# Altium PCB 收音机.PcbDoc
Units mil, origin at the board's own origin, x right, y up, seen from the top; angles counter-clockwise.
Board outline 3937.01 x 3150 mil, 2 copper layers (Top Layer, Bottom Layer); 51 components, 32 nets, 137 pads, 52 vias.
Unrouted connection lines stored in the file: 8.
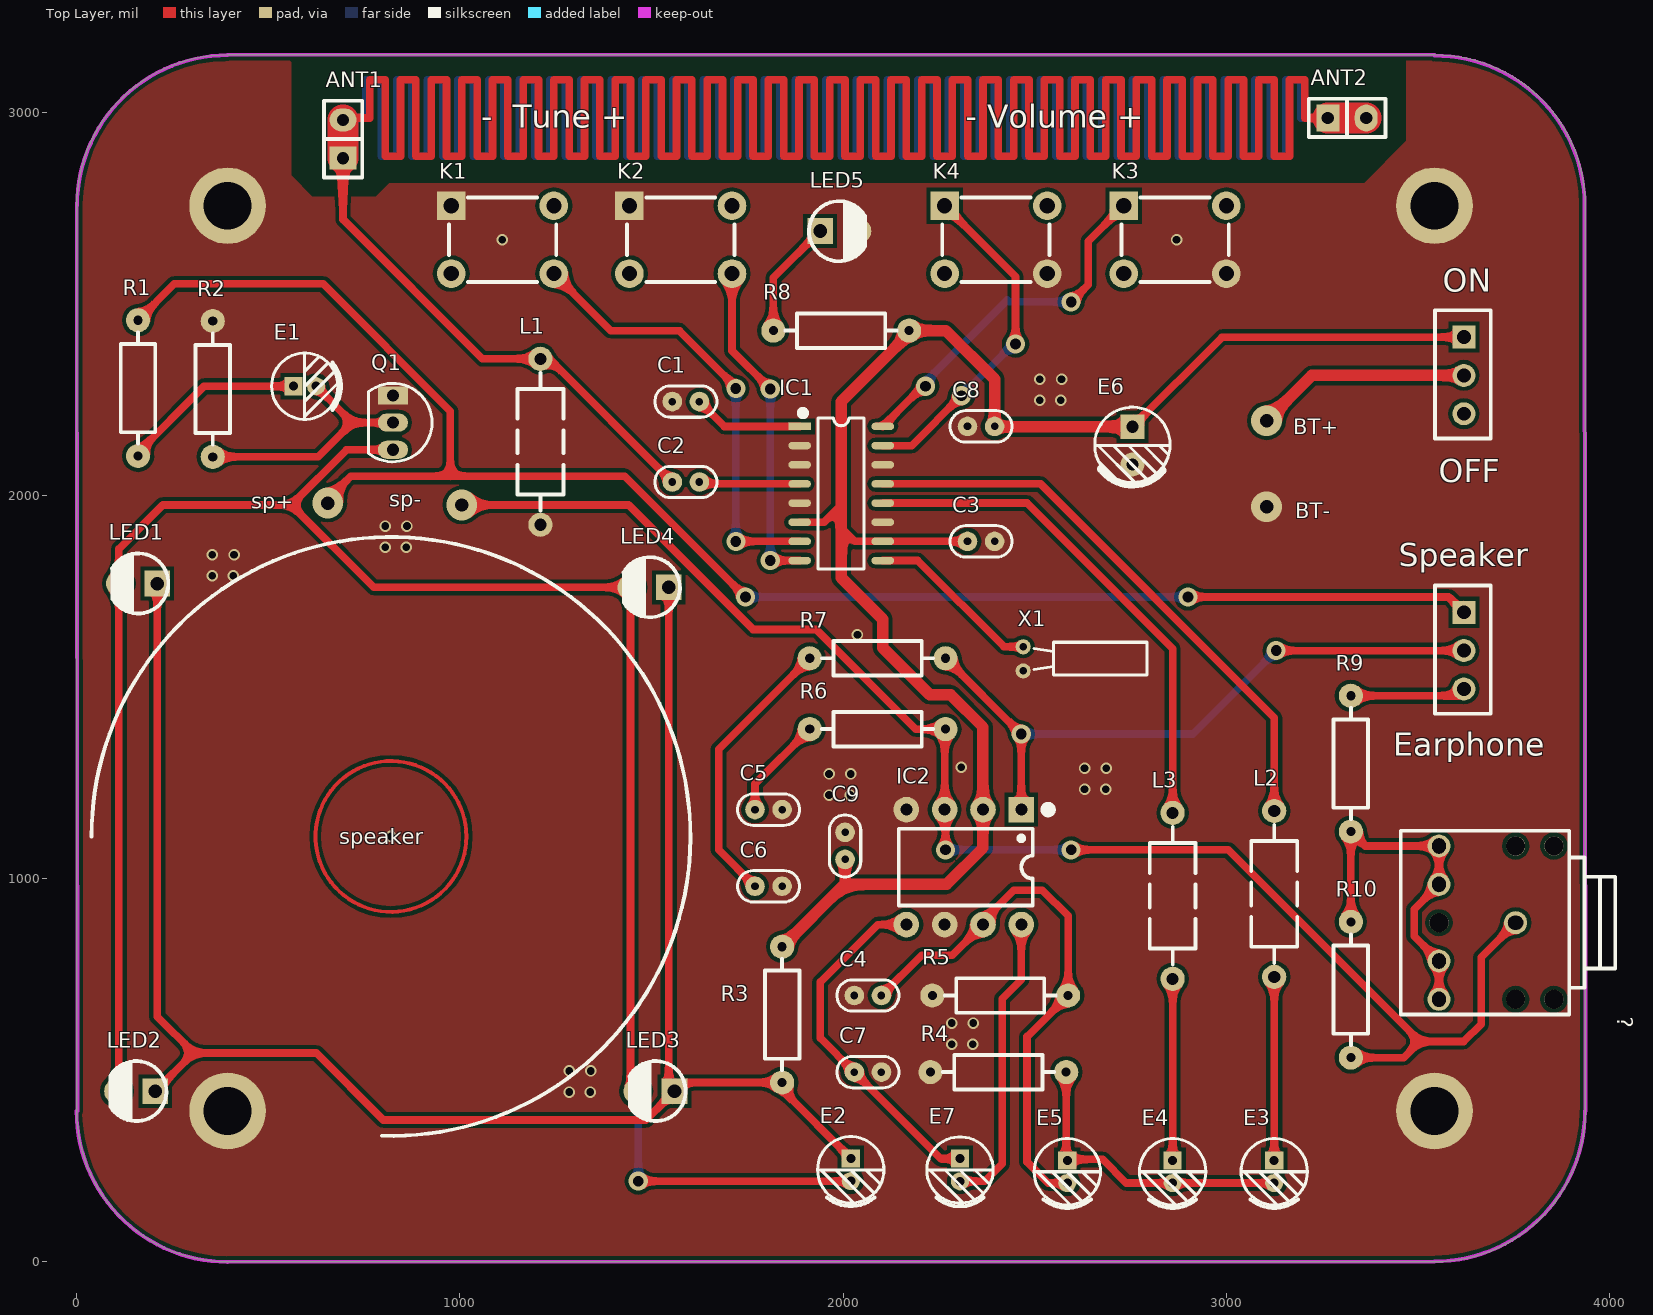
[diagram p0: Top Layer view]
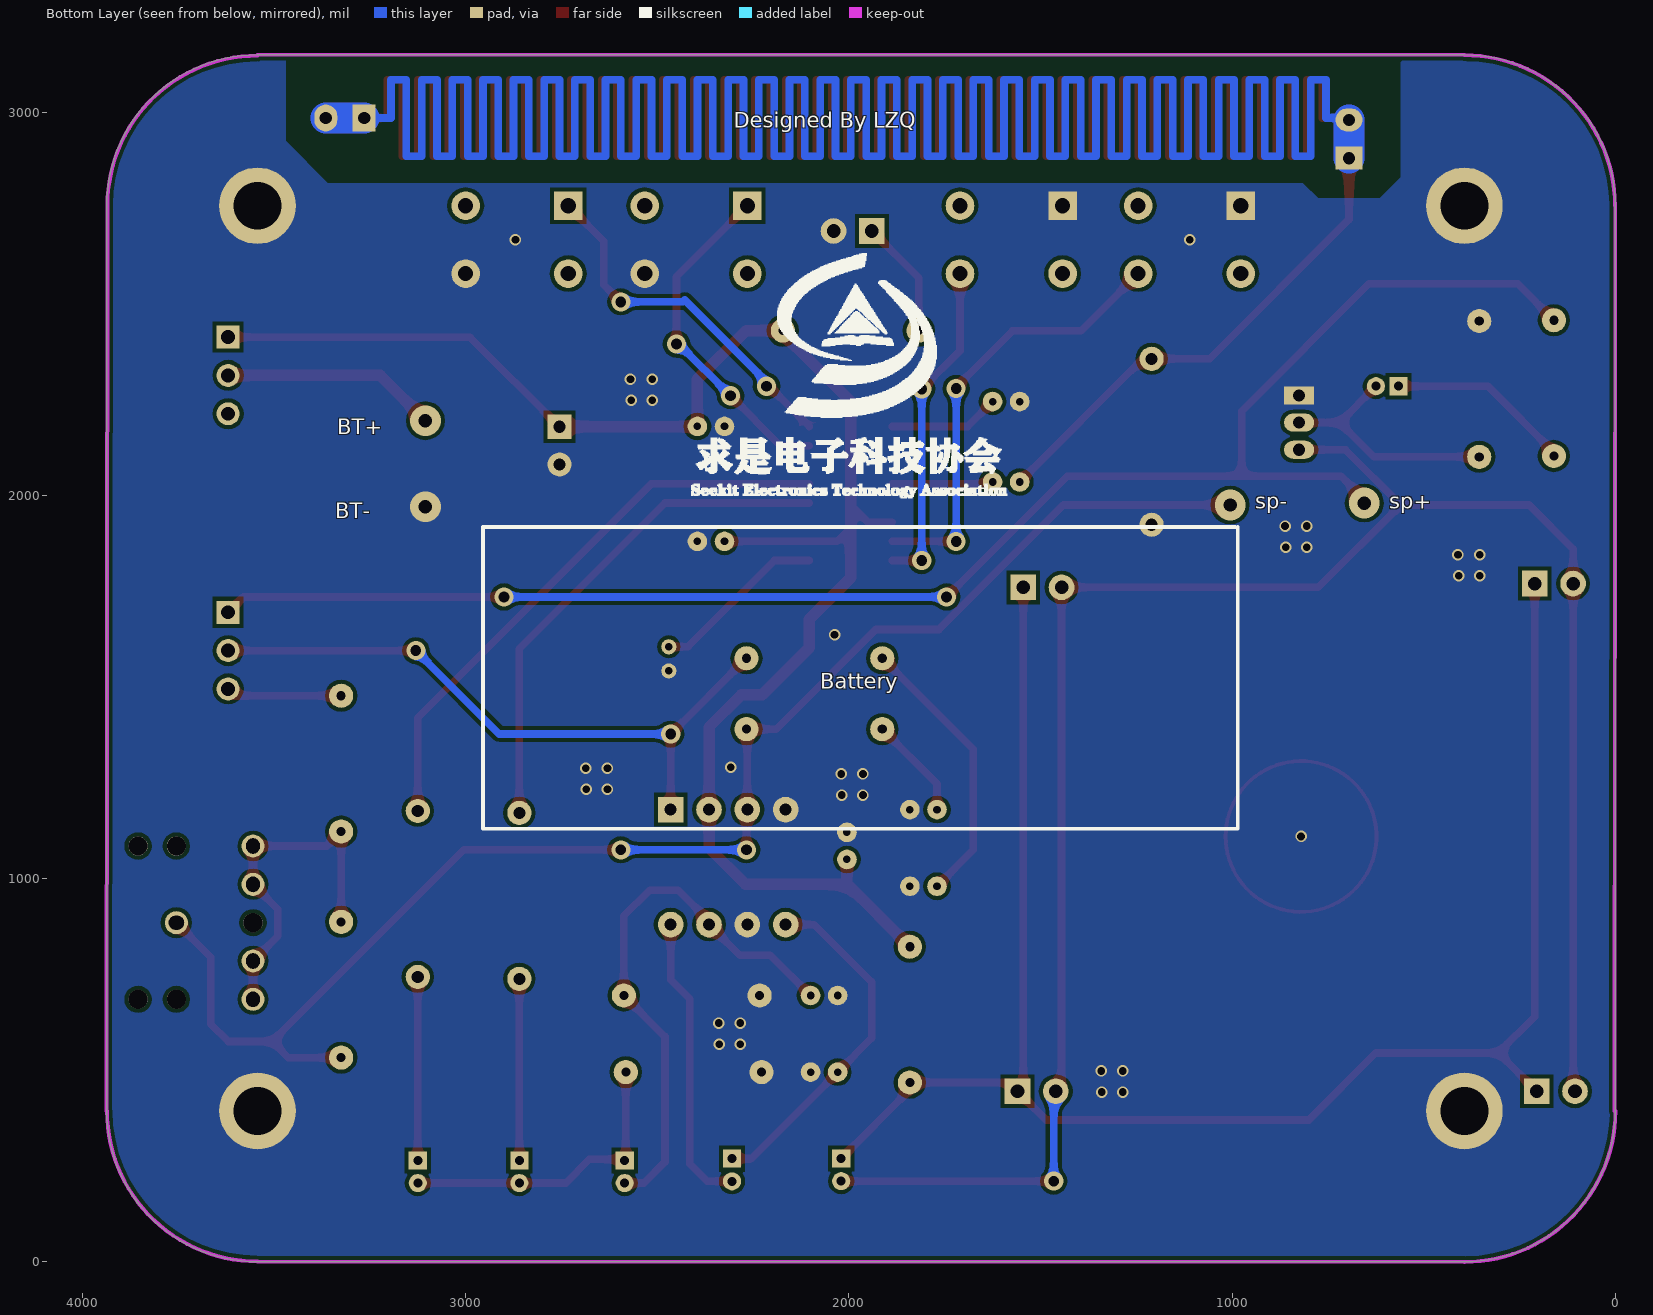
[diagram p1: Bottom Layer view, seen from below]
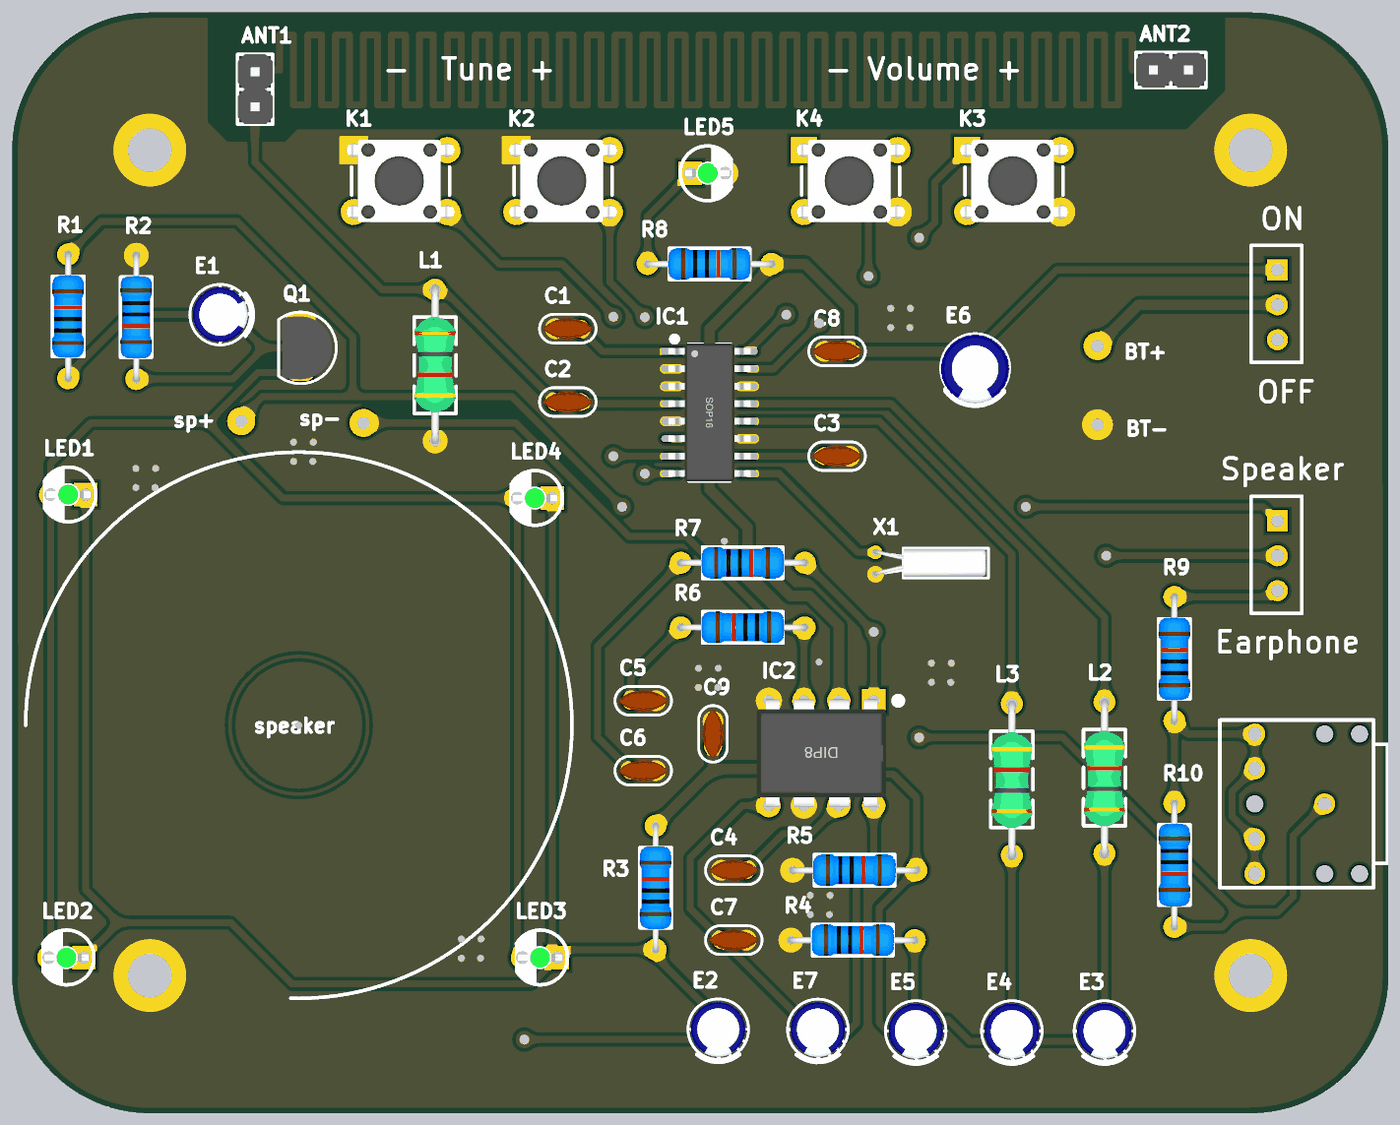
[diagram p2: 3D render of the assembled board from above, using the file's embedded part models]

## Layer stack, top to bottom
Top Solder: solder mask 0.4, Solder Resist, Dk 3.5
Top Layer: signal copper 1.4
Dielectric 1: dielectric 12.6, FR-4, Dk 4.8
Bottom Layer: signal copper 1.4
Bottom Solder: solder mask 0.4, Solder Resist, Dk 3.5

## Board outline
0,393.7 ccw(c393.7,393.7) 393.7,0 3543.31,0 ccw(c3543.31,393.7) 3937.01,393.7 3937.01,2755.91 ccw(c3543.31,2755.91) 3543.31,3149.61 3543.31,3150 393.7,3150 393.7,3149.61 ccw(c393.7,2755.91) 0,2755.91

## Design rules (kind name [scope] priority, off if disabled: settings)
Clearance [All] p1: gap=10 ignorepadtopadclearanceinfootprint=FALSE except(0: Arc-Hole Track-Hole SMDPad-Hole THPad-Hole Via-Hole Fill-Hole Poly-Hole Region-Hole Text-Hole)
PolygonConnect [All] p1: connectstyle=Direct reliefconductorwidth=20 reliefentries=4 polygonreliefangle="90 Angle" airgapwidth=10
RoutingVias [All] p1: holewidth=28 width=50 viastyle="Through Hole" minholewidth=20 minwidth=30 maxholewidth=35 maxwidth=80
SolderMaskExpansion [All] p1: expansion=4
Width [All] p1: maxlimit=100 minlimit=10 preferedwidth=20
30 further rules are at their usual default settings.

## Classes and differential pairs
component class Sheet1: ANT1 ANT2 C1 C2 C3 C4 C5 C6 C7 C8 C9 E1 E2 E3 E4 E5 E6 E7 IC1 IC2 K1 K2 K3 K4 L1 L2 L3 LED1 LED2 LED3 LED4 LED5 LED? Q1 R1 R2 R3 R4 R5 R6 R7 R8 R9 R10 R? X1

## Components (designator, comment, footprint, x,y, rotation, side; value= is the part's Value field where it differs from the comment)
? "" ? 3735,885 r270 top
ANT1 "ANT" "Pin HDR1X2/2.54mm-S" 695,2880 r180 top
ANT2 "ANT" "Pin HDR1X2/2.54mm-S" 3265,2985 r90 top
C1 "103" "CC 1.8*3.6" 1589.57,2245 r0 top
C2 "27pF" "CC 1.8*3.6" 1589.57,2035 r0 top
C3 "223" "CC 1.8*3.6" 2360,1880 r0 top
C4 "222" "CC 1.8*3.6" 2064.57,695 r0 top
C5 "104" "CC 1.8*3.6" 1805.43,1180 r0 top
C6 "104" "CC 1.8*3.6" 1805.43,980 r180 top
C7 "103" "CC 1.8*3.6" 2064.57,495 r180 top
C8 "104" "CC 1.8*3.6" 2360,2180 r0 top
C9 "104" "CC 1.8*3.6" 2005,1085.43 r270 top
E1 "10uF/16V" "CAP 1.5*4*8" 595,2285 r0 top
E2 "10uF/16V" "CAP 1.5*4*8" 2020,240 r270 top
E3 "10uF/16V" "CAP 1.5*4*8" 3125,235 r270 top
E4 "10uF/16V" "CAP 1.5*4*8" 2860,235 r270 top
E5 "10uF/16V" "CAP 1.5*4*8" 2585,235 r270 top
E6 "470uF/16V" "CAP 2.5*5*11" 2755,2130 r270 top
E7 "10uF/16V" "CAP 1.5*4*8" 2305,239.53 r270 top
IC1 "CH340G" SOP16_L 1995,2005 r0 top
IC2 "LM393" DIP8-300 2315,1030 r270 top
K1 "KEY" DIP-6X6X5 977.28,2755.91 r0 top
K2 "KEY" DIP-6X6X5 1442.28,2755.91 r0 top
K3 "KEY" DIP-6X6X5 2732.28,2755.91 r0 top
K4 "KEY" DIP-6X6X5 2265,2755.91 r0 top
L1 "0.1uH" AL0307 1210,2140 r90 top
L2 "0.1uH" AL0307 3125,960 r270 top
L3 "0.1uH" AL0307 2860,955 r270 top
LED1 "绿色" "LED 3MM-G" 160,1770 r180 top
LED2 "绿色" "LED 3MM-G" 155,445 r180 top
LED3 "绿色" "LED 3MM-G" 1510,445 r180 top
LED4 "绿色" "LED 3MM-G" 1495,1760 r180 top
LED5 "红色" "LED 3MM-G" 1990,2690 r0 top
Q1 "NPN" TO-92A 825,2260.87 r270 top
R1 "1K" "RS 1/4W" 160,2280 r90 top
R2 "1K" "RS 1/4W" 355,2277.83 r270 top
R3 "22" "RS 1/4W" 1840.87,645 r90 top
R4 "10K" "RS 1/4W" 2405,495 r0 top
R5 "10K" "RS 1/4W" 2410,695 r0 top
R6 "22" "RS 1/4W" 2090,1390 r180 top
R7 "22" "RS 1/4W" 2090,1575 r0 top
R8 "220" "RS 1/4W" 1995,2430 r0 top
R9 "1K" "RS 1/4W" 3325,1300 r90 top
R10 "22" "RS 1/4W" 3325,710 r270 top
X1 "XTAL-2P" OSC-2x6-WI-A 2470,1605 r270 top
? "" "SS12D00G4 1*3" 3617.16,1597.68 r270 top
? "" "SS12D00G4 1*3" 3617.16,2315.79 r270 top
? "Comment" "M3 125X200"#1 3390,1395 r0 top
? "Comment" "M3 125X200"#2 3135,1650 r0 top
? "Comment" "M3 125X200"#3 3270,1015 r0 top
? "Comment" "M3 125X200"#4 350,235 r0 top

## Footprints (in the part's own frame and the unit in brackets; to place one, negate y for a bottom-side part, rotate by r counter-clockwise, add the part's x,y. Pads: shape width x height; smd on the part's side, far side on the other; paste and mask are expansions set on the pad)
AL0307 [mm] "11*3*7mm（脚距，直径，长度）"
  round 1.6 hole 0.8: 1(-5.5,0) 2(5.5,0)
  silkscreen extent -4.57,-1.52 4.57,1.52, body extent -5.71,-1.51 5.84,1.51, height 3.06
"CAP 1.5*4*8" [mm] "脚距1.5mm直径4mm高度8mm"
  rect 1.2x1.2 hole 0.6: 1(-0.75,0)
  round 1.2 hole 0.6: 2(0.75,0)
  silkscreen extent -2.2,-2.2 2.41,2.2, body extent -2,-2 2.02,2, height 8.04
"CAP 2.5*5*11" [mm] "脚距2.5mm直径5mm高度11mm"
  rect 1.6x1.6 hole 0.8: 1(-1.25,0)
  round 1.6 hole 0.8: 2(1.25,0)
  silkscreen extent -2.55,-2.5 2.6,2.5, body extent -2.5,-2.5 2.51,2.5, height 11.03
"CC 1.8*3.6" [mm] "脚距1.8mm直径3.6mm"
  round 1.3 hole 0.5: 1(-0.9,0) 2(0.9,0)
  silkscreen extent -2.05,-1.04 2.05,1.04, body extent -1.8,-0.8 1.8,0.8, height 3.6
DIP8-300 [mm] "9.4*7.6*3.8(长宽高）"
  rect 1.7x1.7 hole 0.8: 1(-3.81,3.81)
  round 1.7 hole 0.8: 2(-3.81,1.27) 3(-3.81,-1.27) 4(-3.81,-3.81) 5(3.81,-3.81) 6(3.81,-1.27) 7(3.81,1.27) 8(3.81,3.81)
  silkscreen extent -4.06,-4.32 2.54,5.84, body extent -3.93,-4.7 3.93,4.7, height 4.5
DIP-6X6X5 [mm]
  rect 1.9x1.9 hole 1: 1(0,0)
  round 1.9 hole 1: 2(0,-4.5) 3(6.8,-4.5) 4(6.8,0)
  silkscreen extent -0.16,-5.04 6.96,0.54, body extent -0.8,-5.24 7.41,0.76, height 4.95
"LED 3MM-G" [mm] "绿色3mm直插LED"
  rect 1.7x1.7 hole 0.9: 1(-1.27,0)
  round 1.7 hole 0.9: 2(1.27,0)
  silkscreen extent -2.01,-2 1.72,1.98, body extent -1.95,-1.95 1.64,1.95, height 5.55
"M3 125X200"#1 [mil] "M3螺丝孔，孔125Mil，焊盘200Mil"
  round 200 hole 125: 1(153.31,1360.91)
"M3 125X200"#2 [mil] "M3螺丝孔，孔125Mil，焊盘200Mil"
  round 200 hole 125: 1(408.31,-1256.3)
"M3 125X200"#3 [mil] "M3螺丝孔，孔125Mil，焊盘200Mil"
  round 200 hole 125: 1(-2876.3,1740.91)
"M3 125X200"#4 [mil] "M3螺丝孔，孔125Mil，焊盘200Mil"
  round 200 hole 125: 1(43.7,158.7)
OSC-2x6-WI-A [mm]
  round 1 hole 0.5: 1(0,0) 2(1.6,0)
  silkscreen extent -0.3,0.7 1.87,8.2, body extent -0.25,-0.14 1.75,8.02, height 2.05
"Pin HDR1X2/2.54mm-S" [mil]
  rect 70x60 hole 32: 1(0,0)
  oval 70x60 hole 32: 2(0,-100)
  silkscreen extent -50,-150 50,50, body extent -50,-150 50,50, height 336
"RS 1/4W" [mm] "直插色环电阻，脚距9mm，直径2.3mm"
  round 1.6 hole 0.6: 1(-4.5,0) 2(4.5,0)
  silkscreen extent -3.68,-1.14 3.68,1.14, body extent -4.72,-1.16 4.73,1.16, height 2.32
SOP16_L [mm] "10.3*6.2*1.8mm（长宽高）"
  rect 1.5x0.5 smd: 1(-2.752,4.445)
  oval 1.5x0.5 smd: 2(-2.752,3.175) 3(-2.752,1.905) 4(-2.752,0.635) 5(-2.752,-0.635) 6(-2.752,-1.905) 7(-2.752,-3.175) 8(-2.752,-4.445) 9(2.752,-4.445) 10(2.752,-3.175) 11(2.752,-1.905) 12(2.752,-0.635) 13(2.752,0.635) 14(2.752,1.905) 15(2.752,3.175) 16(2.752,4.445)
  silkscreen extent -2.69,-5 1.52,5.49, body extent -3,-5 3,5, height 1.9
"SS12D00G4 1*3" [mil]
  rect 60x60 hole 36: 1(-97.32,2.84)
  round 60 hole 36: 2(2.68,2.84) 3(102.68,2.84)
  silkscreen extent -167,-73 167,73
TO-92A [mm]
  oval 1.2x2 hole 0.8: B(1.8,0) C(3.6,0)
  rect 1.2x2 hole 0.8: E(0,0)
  silkscreen extent -0.8,-1.6 4.4,2.6, body extent -0.5,-1.31 4.1,2.29, height 6.58
? [mil]
  round 60 hole 36 slot 40 at 90 deg: 1(0,20)
  round 60 hole 36 slot 40 at 0 deg: 2(-200,-180) 3(200,-180) 4(-100,-180) 5(100,-180)
  round 50 hole 50 unplated: ""(-200,120) ""(-200,20) ""(0,-180) ""(200,120) ""(200,20)
  silkscreen extent -240,-280 240,280

## Part data
ANT1 ANT2: library part "Pin HDR1X2"
C1 C2 C3 C4 C5 C6 C7 C8 C9: library part C-CC, "直插瓷片电容"
E1 E2 E3 E4 E5 E6 E7: library part C-CAP, "直插电解电容"
IC1: "串口转USB", BOM名称=串, 学习资源=www.oooc
IC2: library part LM393_A, "双路电压比较", BOM名称=˫, 学习资源=www.oooc
L1 L2 L3: library part L-AL, "色环电感"
LED1 LED2 LED3 LED4 LED5: library part LED-3MM, "插件LED", BOM名称=², 学习资源=www.oooc
Q1: "NPN三极管"
R1 R2 R3 R4 R5 R6 R7 R8 R9 R10: library part R-CRR, "直插色环电阻"
X1: "2脚无源脚晶振"

## Via types
v1: diameter 30, hole 20, Top Layer to Bottom Layer, tented both sides, 33 vias
v2: diameter 50, hole 28, Top Layer to Bottom Layer, tented both sides, 15 vias
v3: diameter 80/80 (per signal layer), hole 35, Top Layer to Bottom Layer, 4 vias

## Nets (pads, with @x,y where several pads share a name; then routed paths per layer and width w, separated by ;. In a path a pad name is that pad's centre, name@x,y a point inside that pad or via, vN(x,y) a via of type N, cw(c..) or ccw(c..) an arc to the next point about the centre after c; other vN are vias at no path point)
3v: ?.1@3620,2413.11 C3.1 C8.2 C9.2 E6.1 IC1.6 IC1.10 IC2.2 R3.2 R8.2 | length 4496.8
  Top Layer w20: IC1.6 1950,1930 1995,1975 ; 1995,1915 2030,1880 IC1.10 C3.1 ; E6.1 2988.9,2413.11 ?.1@3620,2413.11
  Top Layer w30: R3.2 2003.7,985 ; C9.2 2005,986.3 2003.7,985 ; E6.1 2396.22,2179.21 C8.2 2395.43,2302.95 2268.39,2430 R8.2 2172.17,2422.17 1995,2245 1995,1975 1995,1915 1995,1785 2103.35,1676.65 2103.35,1602.41 2225.76,1480 2280.45,1480 2365,1395.45 IC2.2 2365,1080 2270,985 2003.7,985
ANT: ANT1.1 ANT1.2 ANT2.1 ANT2.2 C2.1 L1.2 | length 31247
  Top Layer w20: ANT1.1 695,2720 1058.46,2356.54 L1.2 1232.6,2356.54 C2.1 ; ANT1.2 700,2985 745,2985 765,2985 765,3085 805,3085 805,2985 805,2885 845,2885 845,2985 845,3085 885,3085 885,2985 885,2885 925,2885 925,2985 925,3085 965,3085 965,2985 965,2885 1005,2885 1005,2985 1005,3085 1045,3085 1045,2985 1045,2885 1085,2885 1085,2985 1085,3085 1125,3085 1125,2985 1125,2885 1165,2885 1165,2985 1165,3085 1205,3085 1205,2985 1205,2885 1245,2885 1245,2985 1245,3085 1285,3085 1285,2985 1285,2885 1325,2885 1325,2985 1325,3085 1365,3085 1365,2985 1365,2885 1405,2885 1405,2985 1405,3085 1445,3085 1445,2985 1445,2885 1485,2885 1485,2985 1485,3085 1525,3085 1525,2985 1525,2885 1565,2885 1565,2985 1565,3085 1605,3085 1605,2985 1605,2885 1645,2885 1645,2985 1645,3085 1685,3085 1685,2985 1685,2885 1725,2885 1725,2985 1725,3085 1765,3085 1765,2985 1765,2885 1805,2885 1805,2985 1805,3085 1845,3085 1845,2985 1845,2885 1885,2885 1885,2985 1885,3085 1925,3085 1925,2985 1925,2885 1965,2885 1965,2985 1965,3085 2005,3085 2005,2985 2005,2885 2045,2885 2045,2985 2045,3085 2085,3085 2085,2985 2085,2885 2125,2885 2125,2985 2125,3085 2165,3085 2165,2985 2165,2885 2205,2885 2205,2985 2205,3085 2245,3085 2245,2985 2245,2885 2285,2885 2285,2985 2285,3085 2325,3085 2325,2985 2325,2885 2365,2885 2365,2985 2365,3085 2405,3085 2405,2985 2405,2885 2445,2885 2445,2985 2445,3085 2485,3085 2485,2985 2485,2885 2525,2885 2525,2985 2525,3085 2565,3085 2565,2985 2565,2885 2605,2885 2605,2985 2605,3085 2645,3085 2645,2985 2645,2885 2685,2885 2685,2985 2685,3085 2725,3085 2725,2985 2725,2885 2765,2885 2765,2985 2765,3085 2805,3085 2805,2985 2805,2885 2845,2885 2845,2985 2845,3085 2885,3085 2885,2985 2885,2885 2925,2885 2925,2985 2925,3085 2965,3085 2965,2985 2965,2885 3005,2885 3005,2985 3005,3085 3045,3085 3045,2985 3045,2885 3085,2885 3085,2985 3085,3085 3125,3085 3125,2985 3125,2885 3165,2885 3165,2985 3165,3085 3205,3085 3205,2985 3245,2985 ANT2.1
  Top Layer w80: ANT1.1 ANT1.2 ; ANT2.1 ANT2.2
  Bottom Layer w20: ANT1.2 700,2985 725,2985 755,2985 755,3085 795,3085 795,2985 795,2885 835,2885 835,2985 835,3085 875,3085 875,2985 875,2885 915,2885 915,2985 915,3085 955,3085 955,2985 955,2885 995,2885 995,2985 995,3085 1035,3085 1035,2985 1035,2885 1075,2885 1075,2985 1075,3085 1115,3085 1115,2985 1115,2885 1155,2885 1155,2985 1155,3085 1195,3085 1195,2985 1195,2885 1235,2885 1235,2985 1235,3085 1275,3085 1275,2985 1275,2885 1315,2885 1315,2985 1315,3085 1355,3085 1355,2985 1355,2885 1395,2885 1395,2985 1395,3085 1435,3085 1435,2985 1435,2885 1475,2885 1475,2985 1475,3085 1515,3085 1515,2985 1515,2885 1555,2885 1555,2985 1555,3085 1595,3085 1595,2985 1595,2885 1635,2885 1635,2985 1635,3085 1675,3085 1675,2985 1675,2885 1715,2885 1715,2985 1715,3085 1755,3085 1755,2985 1755,2885 1795,2885 1795,2985 1795,3085 1835,3085 1835,2985 1835,2885 1875,2885 1875,2985 1875,3085 1915,3085 1915,2985 1915,2885 1955,2885 1955,2985 1955,3085 1995,3085 1995,2985 1995,2885 2035,2885 2035,2985 2035,3085 2075,3085 2075,2985 2075,2885 2115,2885 2115,2985 2115,3085 2155,3085 2155,2985 2155,2885 2195,2885 2195,2985 2195,3085 2235,3085 2235,2985 2235,2885 2275,2885 2275,2985 2275,3085 2315,3085 2315,2985 2315,2885 2355,2885 2355,2985 2355,3085 2395,3085 2395,2985 2395,2885 2435,2885 2435,2985 2435,3085 2475,3085 2475,2985 2475,2885 2515,2885 2515,2985 2515,3085 2555,3085 2555,2985 2555,2885 2595,2885 2595,2985 2595,3085 2635,3085 2635,2985 2635,2885 2675,2885 2675,2985 2675,3085 2715,3085 2715,2985 2715,2885 2755,2885 2755,2985 2755,3085 2795,3085 2795,2985 2795,2885 2835,2885 2835,2985 2835,3085 2875,3085 2875,2985 2875,2885 2915,2885 2915,2985 2915,3085 2955,3085 2955,2985 2955,2885 2995,2885 2995,2985 2995,3085 3035,3085 3035,2985 3035,2885 3075,2885 3075,2985 3075,3085 3115,3085 3115,2985 3115,2885 3155,2885 3155,2985 3155,3085 3195,3085 3195,2985 3235,2985 3255,2985 ANT2.1
  Bottom Layer w80: ANT1.1 ANT1.2 ; ANT2.1 ANT2.2
BT: ?.2@3620,2313.11 | length 563.9
  Top Layer w30: v3(3105,2195) 3223.11,2313.11 ?.2@3620,2313.11
earphone: ?.2@3555,1085 ?.3@3555,685 ?.4 ?.5 R9.1 R10.1 | length 935.2
  Top Layer w20: R10.1 R9.1 3362.83,1085 3555,1085 ?.4 3490,920 3490,850 ?.5 ?.3@3555,685
GND: ?.1@393.7,393.7 ?.1@393.7,2755.91 ?.1@3543.31,393.7 ?.1@3543.31,2755.91 C1.1 C3.2 C4.1 C5.2 C6.1 C7.1 C8.1 C9.1 E6.2 IC1.2 IC1.3 IC1.5 IC1.11 IC1.14 IC2.4 IC2.6 K1.1 K2.1 K3.3 K4.3 L1.1 LED5.2 Q1.E R2.1 R4.1 R5.1 X1.2
  other v1: 1285,443.09 1340,443.09 1285,498.09 1341.65,498.09 2283.35,568.09 2338.35,568.09 2283.35,623.09 2340,623.09 820,1110 1963.35,1218.09 2018.35,1218.09 2630,1232.8 2685,1232.8 1963.35,1273.09 2020,1273.09 2630,1287.8 2686.65,1287.8 2308.35,1290.89 2037.35,1636.76 353.78,1790 408.78,1790 353.78,1845 410.43,1845 805,1865 860,1865 805,1920 861.65,1920 2513.35,2248.09 2568.35,2248.09 2513.35,2303.09 2570,2303.09 1110.38,2667.15 2870,2666.76
  other v3: 3105,1970
NetC1_2: C1.2 IC1.1 | length 288.6
  Top Layer w20: C1.2 1690,2180 IC1.1
NetC2_2: C2.2 IC1.4 | length 263.7
  Top Layer w20: C2.2 1630,2030 IC1.4
NetC3_1: 
NetC4_2: C4.2 E5.2 IC2.7 R5.2 | length 1449.3
  Top Layer w20: C4.2 2205,800 2285,800 IC2.7 2365,890 2445,970 2520,970 2587.17,902.83 R5.2 2480,587.83 2480,260.43 2534.96,205.47 E5.2
NetC5_1: C5.1 R6.2 | length 269.2
  Top Layer w20: C5.1 1770,1247.17 R6.2
NetC6_2: C6.2 R7.1 | length 732.9
  Top Layer w20: C6.2 1675,1075 1675,1337.17 R7.1
NetC7_2: C7.2 E7.1 IC2.5 | length 928.5
  Top Layer w20: IC2.5 2090,880 1940,730 1940,584.13 C7.2 2255.08,269.06 E7.1
NetE1_1: E1.1 R1.1 | length 483.9
  Top Layer w20: R1.1@155,2107.83 332.17,2285 E1.1
NetE1_2: E1.2 Q1.B R2.2 | length 641.4
  Top Layer w20: R2.2 630.2,2100.67 719.53,2190 ; E1.2 719.53,2190 ; Q1.B 719.53,2190
NetE2_1: E2.1 LED1.1 LED2.1 LED3.1 LED4.1 R3.1 | length 4648.4
  Top Layer w20: LED2.1 305,545 ; LED1.1 210,640 305,545 ; LED4.1 1545,460 LED3.1 ; E2.1 1840.87,448.66 R3.1 1582.83,467.83 LED3.1 ; 305,545 625,545 800,370 1485,370 LED3.1
NetE2_2: E2.2 LED1.2 LED2.2 LED3.2 LED4.2 Q1.C | length 5326
  Top Layer w20: LED2.2 110,450 LED1.2 110,1860 225,1975 560,1975 ; Q1.C 704.13,2119.13 560,1975 ; LED3.2 1445,460 LED4.2 775,1760 560,1975 ; v2(1465.47,210.47) E2.2
  Bottom Layer w20: LED3.2 1465.47,439.53 v2(1465.47,210.47)
NetE3_1: E3.1 L2.2 | length 468.9
  Top Layer w20: E3.1@3125,274.53 L2.2
NetE4_1: E4.1 L3.2 | length 463.9
  Top Layer w20: E4.1@2860,274.53 L3.2
NetE7_2: E7.2 IC2.8 | length 774.1
  Top Layer w20: E7.2 2369.53,210 2415,255.47 2415,686.37 2465,736.37 IC2.8
NetIC1_7: IC1.7 K1.3 | length 1167.1
  Top Layer w20: K1.3 1393.74,2430 1572.83,2430 1720,2282.83 v2(1720,2278.92) ; v2(1720,1880) IC1.7
  Bottom Layer w20: v2(1720,1880) v2(1720,2278.92)
NetIC1_8: IC1.8 K2.3 | length 866.8
  Top Layer w20: K2.3 1710,2377.83 v2(1810,2277.83) ; v2(1810,1830) IC1.8
  Bottom Layer w20: v2(1810,1830) v2(1810,2277.83)
NetIC1_9: IC1.9 X1.1 | length 459.9
  Top Layer w20: IC1.9 2195,1830 2420,1605 X1.1
NetIC1_12: IC1.12 L3.1 | length 1342.5
  Top Layer w20: IC1.12 2480,1980 2860,1600 L3.1
NetIC1_13: IC1.13 L2.1 | length 1517.8
  Top Layer w20: IC1.13 2515,2030 3125,1420 L2.1
NetIC1_15: IC1.15 K4.1 | length 894
  Top Layer w20: IC1.15 2178.78,2130 v2(2308.78,2260) ; K4.1 2450,2570.91 v2(2450,2395)
  Bottom Layer w20: v2(2308.78,2260) 2443.78,2395 v2(2450,2395)
NetIC1_16: IC1.16 K3.1 | length 945
  Top Layer w20: IC1.16 2208.35,2285 v2(2215,2285) ; v2(2595,2505) 2640,2550 2640,2663.62 K3.1
  Bottom Layer w20: v2(2215,2285) 2215,2296.65 2428.35,2510 2433.35,2505 v2(2595,2505)
NetIC2_1: ?.2@3620,1595 IC2.1 R7.2 | length 1722.2
  Top Layer w20: R7.2 v2(2465,1377.17) IC2.1 ; v2(3130,1595) ?.2@3620,1595
  Bottom Layer w20: v2(2465,1377.17) 2912.17,1377.17 v2(3130,1595)
NetLED5_1: LED5.1 R8.1 | length 310.6
  Top Layer w20: R8.1 1817.83,2567.83 LED5.1
NetR9_2: ?.3@3620,1495 R9.2 | length 302.4
  Top Layer w20: R9.2 3602.17,1477.17 ?.3@3620,1495
sound: E3.2 E4.2 E5.1 R4.2 | length 796.1
  Top Layer w20: R4.2 2582.17,267.36 2677.17,267.36 2739.06,205.47 E4.2 E3.2
speaker+: ?.1@3620,1695 R1.2 | length 4308.8
  Top Layer w20: R1.2 255,2552.17 642.83,2552.17 975,2220 975,2050 ; v3(655,1980) 655,1990 715,2050 975,2050 ; v2(1745,1735) 1430,2050 975,2050 ; v2(2900,1735) 3580,1735 ?.1@3620,1695
  Bottom Layer w20: v2(1745,1735) v2(2900,1735)
speaker-: ?.1@3755,885 IC2.3 R6.1 R10.2 | length 3946.8
  Top Layer w20: v3(1005,1975) 1440,1975 1765,1650 1930,1650 2190,1390 R6.1 2265,1387.83 IC2.3 2267.17,1177.83 v2(2267.17,1075) ; v2(2595,1075) 3005,1075 3505,575 ; R10.2 3462.83,532.83 3505,575 ; ?.1@3755,885 3665,795 3665,620 3620,575 3505,575
  Bottom Layer w20: v2@2265,1075 v2(2267.17,1075) v2(2595,1075)
pads on no net: ?. ?.3@3620,2213.11 K1.2 K1.4 K2.2 K2.4 K3.2 K3.4 K4.2 K4.4
copper on no net: | length 1236.8
  Top Layer w10: 1016.85,1110 ccw(c820,1110) 1016.85,1110

## Polygon pours and split planes (outlines as drawn)
GND on Top Layer "Top Layer-GND" (solid, remove dead copper, pour order 14): 3465,3215 3470,3210 3470,2925 3360,2815 815,2815 780,2780 615,2780 560,2835 560,3245 100,3245 -225,2920 -220,2915 -220,230 260,-250 3675,-250 4300,375 4250,425 4250,2890 3790,3350
no net on Top Layer "Top Layer-No Net" (solid, pour order 4): 4230,3865
GND on Bottom Layer "Bottom Layer-GND" (solid, remove dead copper, pour order 20): 560,3245 560,2830 615,2775 775,2775 815,2815 3360,2815 3470,2925 3470,3220 3920,3220 4320,2820 4320,140 3990,140 3650,-200 260,-200 -180,240 -180,2960 105,3245
no net on Bottom Layer "Bottom Layer-No Net" (solid, pour order 22): 615,2805

## Keep-outs
Keep-Out Layer:
  lines w10: -0.5,393.35 ccw(c393.7,393.7) 393.7,-0.51 ; 0,2755.91 2.01,393.35 ; 0.91,2755.91 cw(c393.7,2755.91) 393.7,3148.69 ; 393.7,0 3543.31,0 ; 393.7,3149.61 3543.31,3150 ; 3543.31,0.94 ccw(c3543.31,393.7) 3936.07,393.7 ; 3543.31,3147.6 cw(c3543.31,2755.91) 3935,2755.91 3937.01,393.7

## Silkscreen, mask and mechanical layers (free items; w line width, h text height)
Top Overlay:
  lines w10: 38.45,1110 cw(c820,1110) 796.8,328.79
  text "-  Tune +" at 1055,2960 h60
  text "- Volume +" at 2320,2960 h60
  text "ON" at 3565,2530.93 h60
  text "BT+" at 3175,2160 h40
  text "OFF" at 3555,2035 h60
  text "sp-" at 815,1970 h40
  text "sp+" at 455,1965 h40
  text "BT-" at 3180,1940 h40
  text "Speaker" at 3450,1815 h60
  text "Earphone" at 3435,1320 h60
  text "speaker" at 685,1090 h40
Bottom Overlay:
  drawing of 1751 lines, arcs and shapes, not listed
  text "Designed By LZQ" at 2300,2960 h40
  text "BT+" at 3335,2160 h40
  text "sp+" at 590,1965 h40
  text "sp-" at 940,1965 h40
  text "BT-" at 3340,1940 h40
  text "Battery" at 2075,1495 h40
Mechanical 1:
  lines w10: 393.7,3149.61 ccw(c393.7,2755.91) 0,2755.91 0,393.7 ccw(c393.7,393.7) 393.7,0 3543.31,0 ccw(c3543.31,393.7) 3937.01,393.7 3937.01,2755.91 ccw(c3543.31,2755.91) 3543.31,3149.61 ; 393.7,3150 3543.31,3150